# Altium PCB MRpcb.PcbDoc
Units mm, origin at the board's own origin, x right, y up, seen from the top; angles counter-clockwise.
Board outline 98.63 x 46.25 mm, 2 copper layers (Top Layer, Bottom Layer); 33 components, 39 nets, 165 pads, 9 vias.
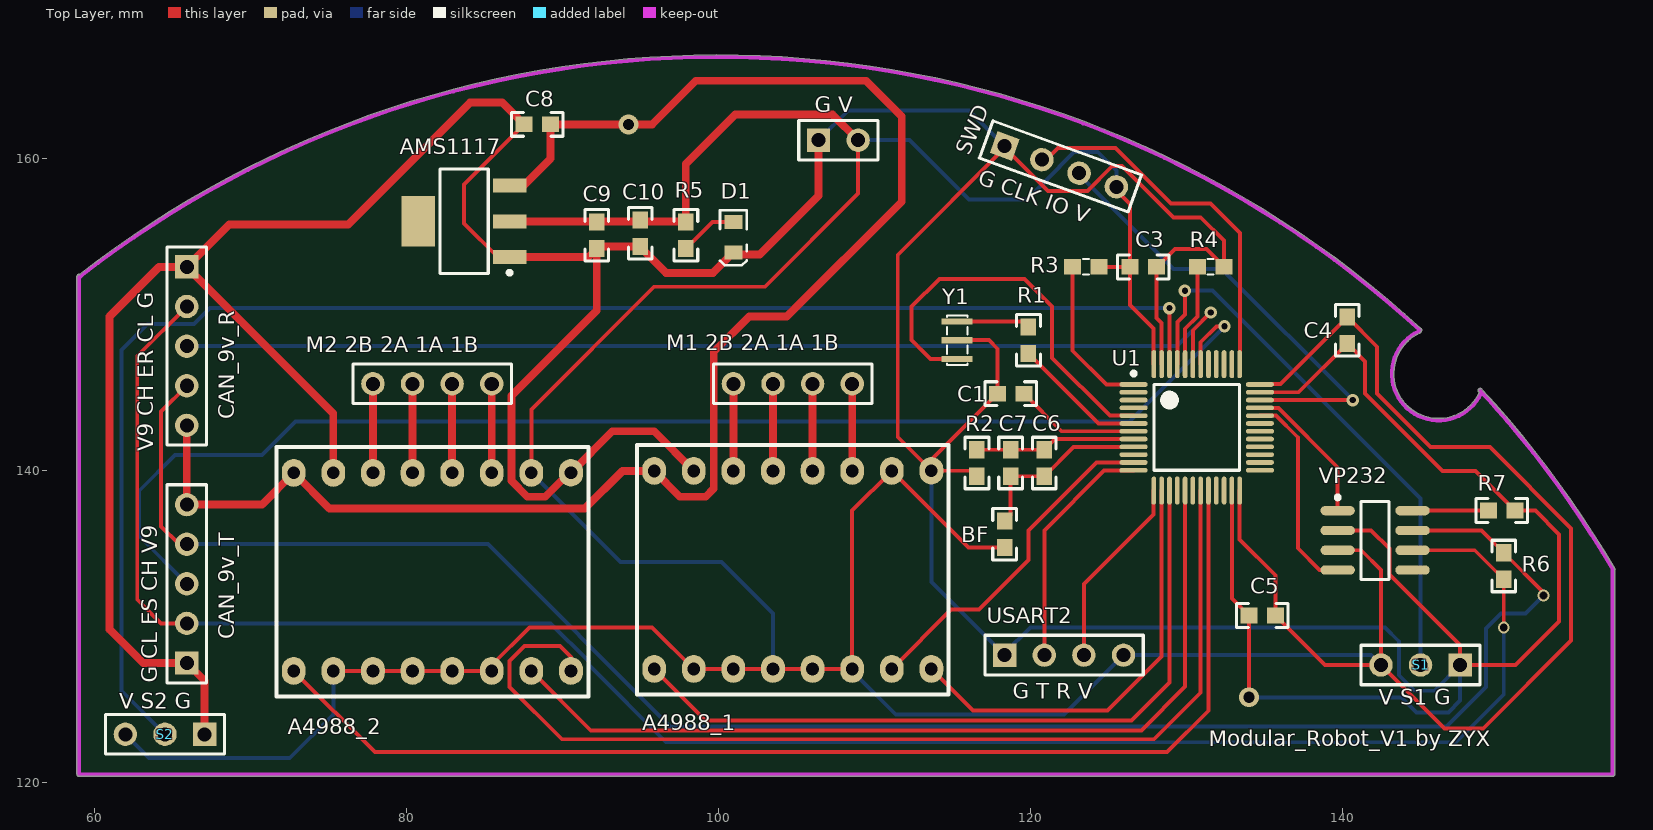
[diagram p0: Top Layer view]
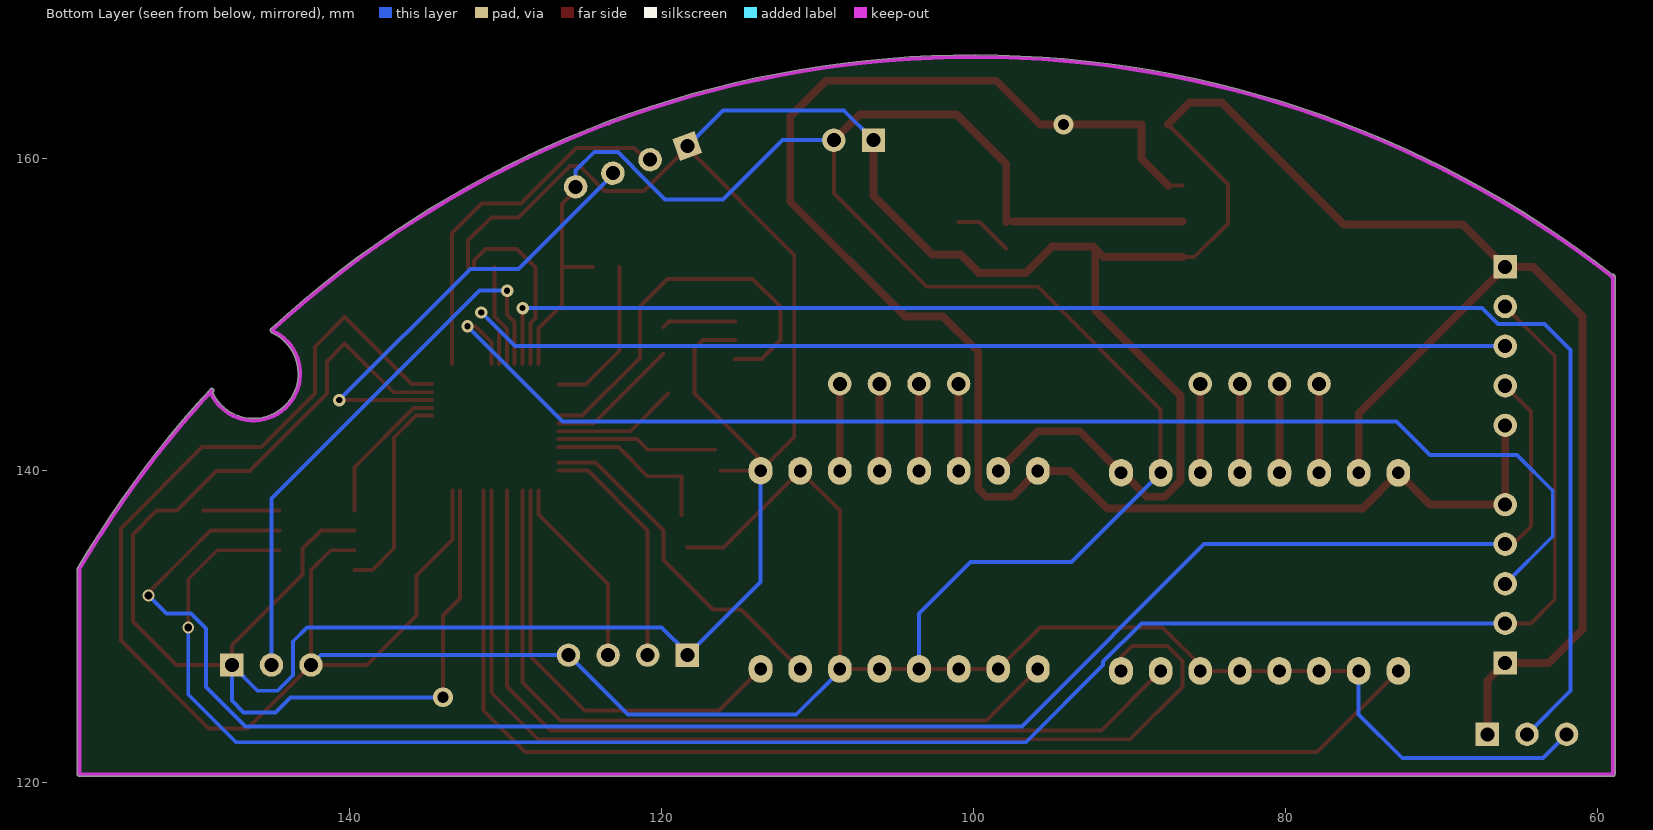
[diagram p1: Bottom Layer view, seen from below]

## Layer stack, top to bottom
Top Solder: solder mask 0.0102, Solder Resist, Dk 3.5
Top Layer: signal copper 0.0356
Dielectric 1: dielectric 0.32, FR-4, Dk 4.8
Bottom Layer: signal copper 0.0356
Bottom Solder: solder mask 0.0102, Solder Resist, Dk 3.5

## Board outline
59,120.373 cw(c59,120.5) 58.873,120.5 58.873,152.427 cw(c59,152.427) 59.038,152.549 cw(c100,100) 145.065,149.075 cw(c144.979,148.981) 145.106,148.981 cw(c144.979,148.981) 145.056,148.88 cw(c144.933,148.914) 144.987,148.798 ccw(c146.19,146.19) 148.798,144.987 cw(c148.914,144.933) 148.799,144.988 ccw(c100,100) 148.763,145.028 cw(c148.857,145.114) 148.95,145.201 cw(c100,100) 157.487,133.682 cw(c157.377,133.618) 157.504,133.618 cw(c157.377,133.618) 157.48,133.544 157.48,120.523 cw(c157.353,120.523) 157.48,120.511 157.48,120.512 cw(c157.353,120.5) 157.48,120.5 cw(c157.353,120.5) 157.353,120.373

## Design rules (kind name [scope] priority, off if disabled: settings)
Clearance [All] p1: gap=0.152
PolygonConnect [All] p1: connectstyle=Relief reliefconductorwidth=0.254 reliefentries=4 polygonreliefangle="90 Angle" airgapwidth=0.254
RoutingVias [All] p1: holewidth=0.711 width=1.27 viastyle="Through Hole" minholewidth=0.3 minwidth=0.7 maxholewidth=1 maxwidth=2
SolderMaskExpansion [All] p1: expansion=0.102
Width [All] p1: maxlimit=0.254 minlimit=0.254 preferedwidth=0.254
30 further rules are at their usual default settings.

## Components (designator, comment, footprint, x,y, rotation, side; value= is the part's Value field where it differs from the comment)
A4988_1 "stepstrick_driver" A4988 104.775,133.604 r270 top
A4988_2 "stepstrick_driver" A4988 81.661,133.477 r270 top
AMS1117 "ASM1117" SOT223 83.693,155.956 r180 top (schematic designator ASM1117)
BF "BF" R1608[0603] 118.364,135.89 r270 top
C1 "cap smd" C1608[0603]N 118.745,144.907 r0 top
C3 "cap smd" C1608[0603]N 127.254,153.035 r0 top
C4 "cap smd" C1608[0603]N 140.335,148.971 r270 top
C5 "cap smd" C1608[0603]N 134.874,130.683 r180 top
C6 "cap smd" C1608[0603]N 120.904,140.462 r90 top
C7 "cap smd" C1608[0603]N 118.745,140.462 r90 top
C8 "cap smd" C1608[0603]N 88.392,162.179 r180 top
C9 "cap smd" C1608[0603]N 92.202,155.067 r270 top
C10 "cap smd" C1608[0603]N 94.996,155.194 r270 top
CAN_9v_R "H_P" HDR1X5 65.913,153.035 r270 top (schematic designator CAN_9v_P)
CAN_9v_T "H_T" HDR1X5 65.913,127.635 r90 top
D1 "LED" D1608[0603] 100.965,154.94 r270 top
"G V" "Header 2" HDR1X2 106.426,161.163 r0 top (schematic designator GV)
"M1 2B 2A 1A 1B" "Motor1" HDR1X4#1 108.585,145.542 r180 top (schematic designator M1)
"M2 2B 2A 1A 1B" "Motor2" HDR1X4#1 85.471,145.542 r180 top (schematic designator M2)
R1 "RES1" R1608[0603] 119.888,148.336 r270 top
R2 "RES1" R1608[0603] 116.586,140.462 r270 top
R3 "RES1" 1608[0603] 123.571,153.035 r180 top
R4 "RES1" 1608[0603] 131.572,153.035 r180 top
R5 "RES1" R1608[0603] 97.917,155.067 r90 top
R6 "RES1" R1608[0603] 150.368,133.858 r90 top
R7 "RES1" R1608[0603] 150.241,137.414 r0 top
S1 "Header 3" HDR1X3 147.574,127.508 r180 top
S2 "Header 3" HDR1X3 67.056,123.063 r180 top
SWD "Header 4" HDR1X4#2 118.364,160.782 r340 top
U1 "STM32F103C8T6" STM-LQFP48_N 130.683,142.748 r0 top
USART2 "Header 4" HDR1X4#2 118.364,128.143 r0 top
VP232 "VP230" VP232 142.113,135.509 r0 top
Y1 "CRYSTAL_8M" Crystal_C 115.316,148.336 r90 top

## Footprints (in the part's own frame and the unit in brackets; to place one, negate y for a bottom-side part, rotate by r counter-clockwise, add the part's x,y. Pads: shape width x height; smd on the part's side, far side on the other; paste and mask are expansions set on the pad)
1608[0603] [mm] "Chip Capacitor; Body 1.6 x 0.8 mm (LxW typ)"
  rect 1.1x1 smd: 1(-0.85,0) 2(0.85,0)
  silkscreen extent -0.2,-0.5 0.2,0.5
A4988 [mil]
  oval 70x60 hole 32: 1(-250.39,350) 2(-250,250) 3(-250,150) 4(-250,50) 5(-250,-50) 6(-250,-150) 7(-250,-250) 8(-250,-350) 9(250,350) 10(250,250) 11(250,150) 12(250,50) 13(250,-50) 14(250,-150) 15(250,-250) 16(250,-350)
  silkscreen extent -315,-394 315,394
C1608[0603]N [mm] "Chip Capacitor; Body 1.6 x 0.8 mm (LxW typ)"
  rect 1.1x1 smd: 1(-0.85,0) 2(0.85,0)
  silkscreen extent -1.65,-0.76 1.65,0.76, body extent -0.8,-0.4 0.8,0.4, height 0.8
Crystal_C [mm] "含电容晶振，村田 3.2X1.3mm"
  rect 0.4x2 smd: 1(-1.2,0) 2(0,0) 3(1.2,0)
  silkscreen extent -1.6,-0.65 1.6,0.65
D1608[0603] [mm]
  rect 0.9x1.15 smd: 1(-0.98,0) 2(0.98,0)
  silkscreen extent -1.73,-0.86 1.8,0.86, body extent -0.8,-0.4 0.8,0.4, height 0.8
HDR1X2 [mm] "Connector; Header; 2 Position"
  rect 1.5x1.5 hole 0.9: 1(0,0)
  round 1.5 hole 0.9: 2(2.54,0)
  silkscreen extent -1.27,-1.27 3.81,1.27
HDR1X3 [mm] "Connector; Header; 3 Position"
  rect 1.5x1.5 hole 0.9: 1(0,0)
  round 1.5 hole 0.9: 2(2.54,0) 3(5.08,0)
  silkscreen extent -1.27,-1.27 6.35,1.27
HDR1X4#1 [mm] "Connector; Header; 4 Position"
  round 1.5 hole 0.9: 1(0,0) 2(2.54,0) 3(5.08,0) 4(7.62,0)
  silkscreen extent -1.27,-1.27 8.89,1.27
HDR1X4#2 [mm] "Connector; Header; 4 Position"
  rect 1.5x1.5 hole 0.9: 1(0,0)
  round 1.5 hole 0.9: 2(2.54,0) 3(5.08,0) 4(7.62,0)
  silkscreen extent -1.27,-1.27 8.89,1.27
HDR1X5 [mm] "Connector; Header; 5 Position"
  rect 1.5x1.5 hole 0.9: 1(0,0)
  round 1.5 hole 0.9: 2(2.54,0) 3(5.08,0) 4(7.62,0) 5(10.16,0)
  silkscreen extent -1.27,-1.27 11.43,1.27
R1608[0603] [mm] "Chip Capacitor; Body 1.6 x 0.8 mm (LxW typ)"
  rect 1.1x1 smd: 1(-0.85,0) 2(0.85,0)
  silkscreen extent -1.65,-0.76 1.65,0.76, body extent -0.8,-0.4 0.8,0.4, height 0.5
SOT223 [mm] "SOT223, 4-Leads, Body 6.50x7.00mm (avg), Pitch 2.29mm, IPC Medium Density"
  rect 2.15x0.9 smd: 1(-2.925,2.29) 2(-2.925,0) 3(-2.925,-2.29)
  rect 2.15x3.25 smd: 4(2.925,0)
  silkscreen extent -3.05,-3.35 1.55,3.41, body extent -1.85,-3.35 1.85,3.35, height 1.8
STM-LQFP48_N [mm] "QFP, 48-Leads, Body 7x7mm, Pitch 0.5mm, IPC Medium Density"
  oval 1.8x0.3 smd: 1(-4.05,2.75) 2(-4.05,2.25) 3(-4.05,1.75) 4(-4.05,1.25) 5(-4.05,0.75) 6(-4.05,0.25) 7(-4.05,-0.25) 8(-4.05,-0.75) 9(-4.05,-1.25) 10(-4.05,-1.75) 11(-4.05,-2.25) 12(-4.05,-2.75) 25(4.05,-2.75) 26(4.05,-2.25) 27(4.05,-1.75) 28(4.05,-1.25) 29(4.05,-0.75) 30(4.05,-0.25) 31(4.05,0.25) 32(4.05,0.75) 33(4.05,1.25) 34(4.05,1.75) 35(4.05,2.25) 36(4.05,2.75)
  oval 0.3x1.8 smd: 13(-2.75,-4.05) 14(-2.25,-4.05) 15(-1.75,-4.05) 16(-1.25,-4.05) 17(-0.75,-4.05) 18(-0.25,-4.05) 19(0.25,-4.05) 20(0.75,-4.05) 21(1.25,-4.05) 22(1.75,-4.05) 23(2.25,-4.05) 24(2.75,-4.05) 37(2.75,4.05) 38(2.25,4.05) 39(1.75,4.05) 40(1.25,4.05) 41(0.75,4.05) 42(0.25,4.05) 43(-0.25,4.05) 44(-0.75,4.05) 45(-1.25,4.05) 46(-1.75,4.05) 47(-2.25,4.05) 48(-2.75,4.05)
  silkscreen extent -4.17,-2.75 2.75,3.57, body extent -3.5,-3.5 3.5,3.5, height 1.6
VP232 [mm]
  oval 2.2x0.6 smd: 1(-2.394,1.898) 2(-2.394,0.628) 3(-2.394,-0.642) 4(-2.394,-1.912) 5(2.406,-1.912) 6(2.406,-0.642) 7(2.406,0.628) 8(2.406,1.898)
  silkscreen extent -2.52,-2.51 0.91,2.87, body extent -1.99,-2.51 2.01,2.49, height 1.75

## Part data
BF: "磁珠"
C1 C3 C4 C5 C6 C7 C8 C9 C10: library part CAP, "贴片无极性电容"
CAN_9v_R CAN_9v_T: library part "Header 5", "Header, 5-Pin"
D1: "蓝色 LED"
"G V": "Header, 2-Pin"
"M1 2B 2A 1A 1B" "M2 2B 2A 1A 1B": library part "Header 4", "Header, 4-Pin"
S1 S2: "Header, 3-Pin"
SWD USART2: "Header, 4-Pin"
U1: "STM32 ARM-based 32-bit MCU Performance Line with 64 kB Flash, 20 kB Internal RAM, -40 to +85癈 Temperature, 48-Pin LQFP, Tray"
VP232: library part Component_1
Y1: library part CRYSTAL_C, "Crystal_8M"

## Via types
v1: diameter 0.8, hole 0.4, Top Layer to Bottom Layer, 5 vias
v2: diameter 0.762, hole 0.508, Top Layer to Bottom Layer, 2 vias
v3: diameter 1.27, hole 0.711, Top Layer to Bottom Layer, 2 vias

## Nets (pads, with @x,y where several pads share a name; then routed paths per layer and width w, separated by ;. In a path a pad name is that pad's centre, name@x,y a point inside that pad or via, vN(x,y) a via of type N, cw(c..) or ccw(c..) an arc to the next point about the centre after c; other vN are vias at no path point)
AGND: C6.2 C7.2 R2.1 U1.8 | length 10.3
  Top Layer w0.254: R2.1 C6.2 121.59,141.998 U1.8
BOOT0: R4.2 U1.44 | length 6.6
  Top Layer w0.254: U1.44 129.933,149.071 130.722,149.86 R4.2
CANH: CAN_9v_R.4 CAN_9v_T.4 R6.2 VP232.7 | length 119.6
  Top Layer w0.254: CAN_9v_T.4 65.405,135.255 64.262,136.398 64.262,143.764 CAN_9v_R.4 ; VP232.7 148.939,136.137 R6.2 152.908,132.168 v2(152.908,131.953)
  Bottom Layer w0.254: CAN_9v_T.4 85.217,135.255 96.901,123.571 146.685,123.571 149.225,126.111 149.225,129.856 150.179,130.81 151.765,130.81 v2(152.908,131.953)
CANL: CAN_9v_R.2 CAN_9v_T.2 R6.1 VP232.6 | length 126.9
  Top Layer w0.254: CAN_9v_T.2 64.262,130.175 62.738,131.699 62.738,147.32 CAN_9v_R.2 ; VP232.6 148.509,134.867 R6.1 v2(150.368,129.921)
  Bottom Layer w0.254: CAN_9v_T.2 89.246,130.175 91.694,127.727 91.694,127.508 96.647,122.555 147.32,122.555 150.368,125.603 v2(150.368,129.921)
CANRX: U1.32 VP232.4 | length 13.3
  Top Layer w0.254: U1.32 135.775,143.498 137.16,142.113 137.16,135.001 138.564,133.597 VP232.4
CANTX: U1.33 VP232.1 | length 9.3
  Top Layer w0.254: U1.33 135.91,143.998 139.719,140.189 VP232.1
ER: CAN_9v_R.3 U1.43 | length 70.3
  Top Layer w0.254: U1.43 130.433,148.975 v1(131.572,150.114)
  Bottom Layer w0.254: CAN_9v_R.3 129.413,147.955 v1(131.572,150.114)
ES: CAN_9v_T.3 U1.42 | length 84.6
  Top Layer w0.254: U1.42 130.933,148.205 131.953,149.225 v1(132.461,149.225)
  Bottom Layer w0.254: CAN_9v_T.3 62.865,135.763 62.865,138.684 65.151,140.97 70.739,140.97 72.898,143.129 126.365,143.129 v1(132.461,149.225)
GND: "G V.1" A4988_1.1 A4988_1.7 A4988_2.1 A4988_2.7 AMS1117.1 C1.1 C3.2 C4.2 C5.2 C8.2 C9.2 C10.2 CAN_9v_R.1 CAN_9v_T.1 D1.2 R2.2 R4.1 R7.2 S1.1 S2.1 SWD.1 U1.23 U1.35 U1.47 USART2.1 VP232.2 Y1.2 | length 366.1
  Top Layer w0.254: AMS1117.1 85.856,153.666 83.693,155.829 83.693,158.33 C8.2 ; A4988_2.1@90.434,139.837 A4988_2.1 ; C9.2 C9.2@92.329,154.344 ; Y1.2 117.348,148.336 117.895,147.789 C1.1 113.665,140.677 A4988_1.1 ; R2.2@116.234,139.964 A4988_1.1 ; SWD.1 118.364,160.701 121.151,157.914 123.663,157.914 125.261,159.512 125.901,159.512 129.203,156.21 130.937,156.21 132.422,154.725 R4.1 ; SWD.1@118.427,160.719 111.506,153.797 111.506,142.123 A4988_1.1 ; U1.47 128.433,149.443 128.104,149.772 C3.2 128.143,153.035 129.286,154.178 131.318,154.178 132.041,153.455 R4.1@132.041,153.035 ; U1.23 132.933,131.774 C5.2 v3(134.024,125.437) ; U1.35 137.212,144.998 C4.2 141.478,146.978 141.478,144.907 146.431,139.954 148.551,139.954 R7.2 152.4,137.414 153.924,135.89 153.924,130.302 151.13,127.508 S1.1 147.574,128.778 143.038,133.315 143.038,134.965 141.866,136.137 VP232.2
  Top Layer w0.5: S2.1 67.056,126.492 CAN_9v_T.1 63.119,127.635 60.96,129.794 60.96,149.86 64.135,153.035 CAN_9v_R.1 ; A4988_2.7 75.311,143.637 CAN_9v_R.1 ; AMS1117.1 91.651,153.666 C9.2 92.202,150.241 86.741,144.78 86.741,139.319 87.757,138.303 88.9,138.303 A4988_2.1@90.434,139.837 ; C8.2 86.145,163.576 84.084,163.576 76.269,155.76 68.638,155.76 CAN_9v_R.1 ; A4988_2.1 93.208,142.494 95.885,142.494 A4988_1.7 ; C9.2@92.329,154.344 C10.2 ; C10.2@94.977,154.324 96.647,152.654 99.659,152.654 100.838,153.833 102.652,153.833 106.426,157.607 106.426,161.163
  Bottom Layer w0.254: 106.426,161.163 108.331,163.068 116.078,163.068 SWD.1 ; A4988_1.1 113.665,132.842 USART2.1 118.364,128.27 120.015,129.921 142.748,129.921 143.637,129.032 143.637,126.873 144.653,125.857 145.923,125.857 S1.1 147.574,125.222 146.812,124.46 144.78,124.46 143.803,125.437 v3(134.024,125.437)
MOTOR1_1A: "M1 2B 2A 1A 1B.2" A4988_1.4 | length 5.6
  Top Layer w0.5: A4988_1.4 106.045,145.542
MOTOR1_1B: "M1 2B 2A 1A 1B.1" A4988_1.3 | length 5.6
  Top Layer w0.5: A4988_1.3 108.585,145.542
MOTOR1_2A: "M1 2B 2A 1A 1B.3" A4988_1.5 | length 5.6
  Top Layer w0.5: A4988_1.5 103.505,145.542
MOTOR1_2B: "M1 2B 2A 1A 1B.4" A4988_1.6 | length 5.6
  Top Layer w0.5: A4988_1.6 100.965,145.542
MOTOR1_DIR: A4988_1.9 U1.14 | length 28
  Top Layer w0.254: A4988_1.9 116.332,124.587 124.968,124.587 128.433,128.052 U1.14
MOTOR1_ENB: A4988_1.16 U1.15 | length 47.7
  Top Layer w0.254: A4988_1.16 99.187,123.952 126.492,123.952 128.933,126.393 U1.15
MOTOR1_STEP: A4988_1.10 U1.11 | length 22.1
  Top Layer w0.254: A4988_1.10 114.935,131.064 116.713,131.064 119.888,134.239 119.888,136.144 124.242,140.498 U1.11
MOTOR2_1A: "M2 2B 2A 1A 1B.2" A4988_2.4 | length 5.7
  Top Layer w0.5: A4988_2.4 82.931,145.542
MOTOR2_1B: "M2 2B 2A 1A 1B.1" A4988_2.3 | length 5.7
  Top Layer w0.5: A4988_2.3 85.471,145.542
MOTOR2_2A: "M2 2B 2A 1A 1B.3" A4988_2.5 | length 5.7
  Top Layer w0.5: A4988_2.5 80.391,145.542
MOTOR2_2B: "M2 2B 2A 1A 1B.4" A4988_2.6 | length 5.7
  Top Layer w0.5: A4988_2.6 77.851,145.542
MOTOR2_DIR: A4988_2.9 U1.19 | length 67.1
  Top Layer w0.254: A4988_2.9 90.551,128.016 89.852,128.714 87.566,128.714 86.614,127.762 86.614,126.111 89.978,122.747 127.95,122.747 130.933,125.73 U1.19
MOTOR2_ENB: A4988_2.16 U1.20 | length 76
  Top Layer w0.254: A4988_2.16 77.978,121.92 128.778,121.92 131.433,124.575 U1.20
MOTOR2_STEP: A4988_2.10 U1.17 | length 57.2
  Top Layer w0.254: A4988_2.10 91.821,123.317 127.127,123.317 129.933,126.123 U1.17
NetD1_1: D1.1 R5.1 | length 3.8
  Top Layer w0.254: R5.1 99.62,155.92 D1.1
NetR1_1: R1.1 Y1.3 | length 4.7
  Top Layer w0.254: Y1.3 119.538,149.536 R1.1
NetR3_2: R3.2 U1.1 | length 10.2
  Top Layer w0.254: R3.2 122.721,147.662 124.885,145.498 U1.1
NetR7_1: R7.1 VP232.8 | length 4.9
  Top Layer w0.254: VP232.8 R7.1@149.384,137.407
NRST: C1.2 U1.7 | length 8
  Top Layer w0.254: C1.2 122.004,142.498 U1.7
OSC_IN: U1.5 Y1.1 | length 26.1
  Top Layer w0.254: Y1.1 113.595,147.136 112.395,148.336 112.395,150.495 114.173,152.273 119.634,152.273 121.412,150.495 121.412,147.193 125.107,143.498 U1.5
OSC_OUT: R1.2 U1.6 | length 8.6
  Top Layer w0.254: R1.2 124.376,142.998 U1.6
S1: S1.2 U1.45 | length 36.2
  Top Layer w0.254: U1.45 129.433,149.499 129.921,149.987 v1(129.921,151.511)
  Bottom Layer w0.254: v1(129.921,151.511) 131.699,151.511 145.034,138.176 S1.2
S2: S2.2 U1.46 | length 97.7
  Top Layer w0.254: U1.46 v1(128.933,150.396)
  Bottom Layer w0.254: S2.2 61.722,125.857 61.722,147.701 63.385,149.364 66.381,149.364 67.413,150.396 v1(128.933,150.396)
SWCLK: SWD.2 U1.37 | length 23.7
  Top Layer w0.254: SWD.2 121.051,159.913 121.793,160.655 125.476,160.655 129.032,157.099 131.572,157.099 133.464,155.207 U1.37@133.464,146.798
SWDIO: SWD.3 U1.34 | length 29.6
  Top Layer w0.254: U1.34 v1(140.688,144.498)
  Bottom Layer w0.254: SWD.3 123.138,158.963 129.193,152.908 132.278,152.908 v1(140.688,144.498)
USART2_RX: U1.13 USART2.3 | length 12.4
  Top Layer w0.254: USART2.3 123.444,132.715 127.902,137.173 U1.13@127.902,138.698
USART2_TX: U1.12 USART2.2 | length 15.8
  Top Layer w0.254: USART2.2 120.904,136.144 124.727,139.967 U1.12@126.633,139.967 ; U1.12@126.155,139.998 U1.12
V9.0: A4988_1.8 A4988_2.8 AMS1117.3 C8.1 CAN_9v_R.5 CAN_9v_T.5 | length 103.2
  Top Layer w0.254: AMS1117.3 AMS1117.3@87.507,158.246
  Top Layer w0.5: CAN_9v_R.5 CAN_9v_T.5 70.739,137.795 A4988_2.8 75.057,137.541 91.44,137.541 93.853,139.954 A4988_1.8 97.536,138.303 99.187,138.303 99.711,138.827 99.711,139.208 99.711,147.59 101.981,149.86 104.394,149.86 111.76,157.226 111.76,162.687 109.474,164.973 98.552,164.973 95.758,162.179 v3(94.234,162.179) C8.1 89.242,159.981 AMS1117.3@87.507,158.246
  Bottom Layer w0.254: A4988_1.8 A4988_1.8@96.012,140.081
VDD: "G V.2" A4988_1.2 A4988_1.11 A4988_1.12 A4988_1.13 A4988_1.14 A4988_1.15 A4988_2.2 A4988_2.11 A4988_2.12 A4988_2.13 A4988_2.14 A4988_2.15 AMS1117.2 BF.2 C3.1 C4.1 C5.1 C9.1 C10.1 R3.1 R5.2 S1.3 S2.3 SWD.4 U1.24 U1.36 U1.48 USART2.4 VP232.3 | length 312.6
  Top Layer w0.254: A4988_2.15 A4988_2.14 A4988_2.13 A4988_2.12 A4988_2.11 85.471,127.508 87.884,129.921 95.758,129.921 A4988_1.15 A4988_1.14 A4988_1.13 A4988_1.12 A4988_1.11 108.585,137.414 A4988_1.2 116.039,135.04 BF.2 ; A4988_2.2 88.011,143.891 95.885,151.765 102.997,151.765 108.966,157.734 108.966,161.163 ; R3.1 C3.1 ; SWD.4 125.524,157.94 126.404,157.06 C3.1 ; U1.48@127.902,146.798 127.902,149.085 126.404,150.583 C3.1 ; U1.24 133.433,135.553 135.724,133.262 C5.1 138.899,127.508 S1.3 ; U1.36@134.733,145.529 136.043,145.529 C4.1 142.24,147.916 142.24,144.907 145.669,141.478 149.479,141.478 154.686,136.271 154.686,129.076 149.054,123.444 146.558,123.444 S1.3 ; VP232.3 141.231,134.867 142.494,133.604 S1.3
  Top Layer w0.5: AMS1117.2 R5.2@97.497,155.956 ; R5.2 97.917,159.639 101.092,162.814 107.315,162.814 108.966,161.163
  Bottom Layer w0.254: S2.3 63.5,121.539 72.517,121.539 75.311,124.333 A4988_2.15 ; A4988_2.2 93.726,134.112 100.203,134.112 103.505,130.81 A4988_1.13 ; A4988_1.11 108.585,127.127 111.379,124.333 122.174,124.333 USART2.4 141.859,128.143 S1.3 ; 108.966,161.163 112.268,161.163 116.078,157.353 119.79,157.353 121.882,159.445 121.882,159.474 122.809,160.401 124.333,160.401 125.524,159.21 SWD.4
VDDA: BF.1 C6.1 C7.1 U1.9 | length 11.2
  Top Layer w0.254: BF.1@118.745,137.121 C7.1 C6.1 122.79,141.498 U1.9
pads on no net: AMS1117.4 U1.2 U1.3 U1.4 U1.10 U1.16 U1.18 U1.21 U1.22 U1.25 U1.26 U1.27 U1.28 U1.29 U1.30 U1.31 U1.38 U1.39 U1.40 U1.41 VP232.5

## Keep-outs
Keep-Out Layer:
  lines w0.254: 59,152.427 59,120.5 157.353,120.5 ; 59.09,152.427 cw(c100,100) 144.979,148.981 ; 144.933,148.914 ccw(c146.19,146.19) 148.914,144.933 ; 148.857,145.114 cw(c100,100) 157.377,133.618 ; 157.353,120.523 157.353,133.604

## Silkscreen, mask and mechanical layers (free items; w line width, h text height)
Top Overlay:
  text "G CLK IO V" at 116.586,158.369 h1 r340
  text "V9 CH ER CL G" at 63.754,141.224 h1 r90
  text "G CL ES CH V9" at 64.008,126.365 h1 r90
  text "G T R V" at 118.872,125.349 h1
  text "V S1 G" at 142.367,124.968 h1
  text "V S2 G" at 61.595,124.714 h1
  text "Modular_Robot_V1 by ZYX" at 131.445,122.301 h1